# EAGLE board edgemountBoard (EAGLE 8.2.2)
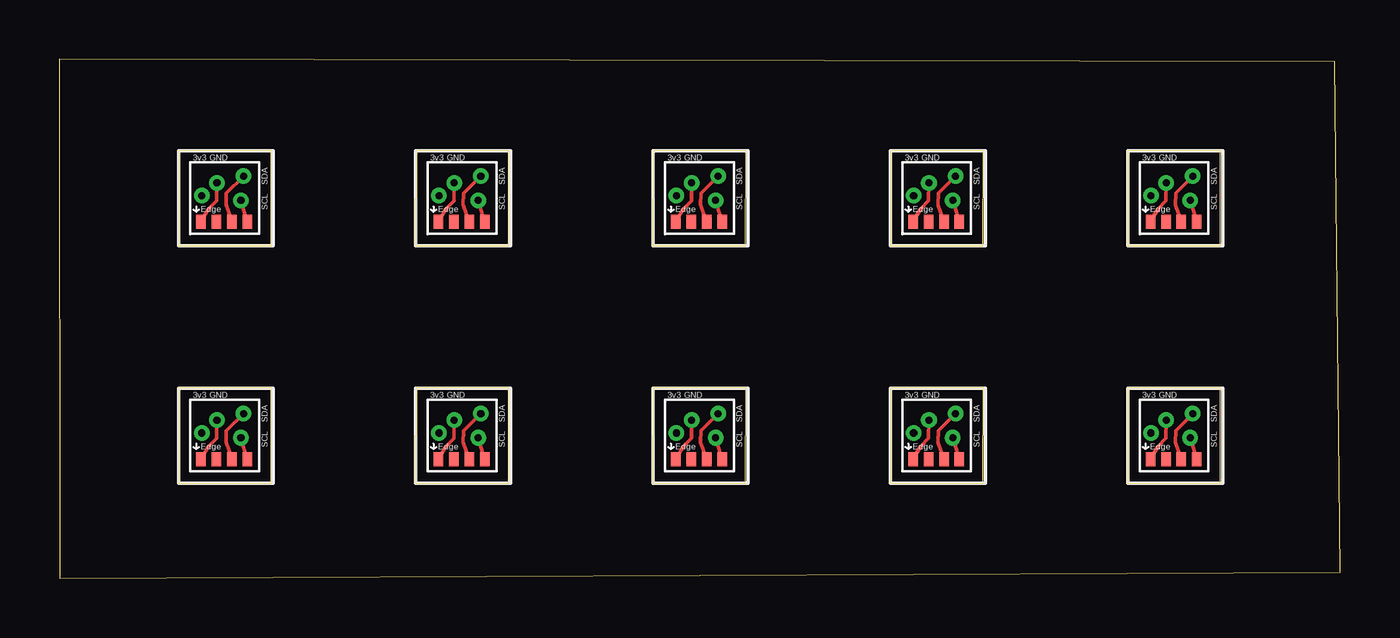
[diagram p0: board, top side]
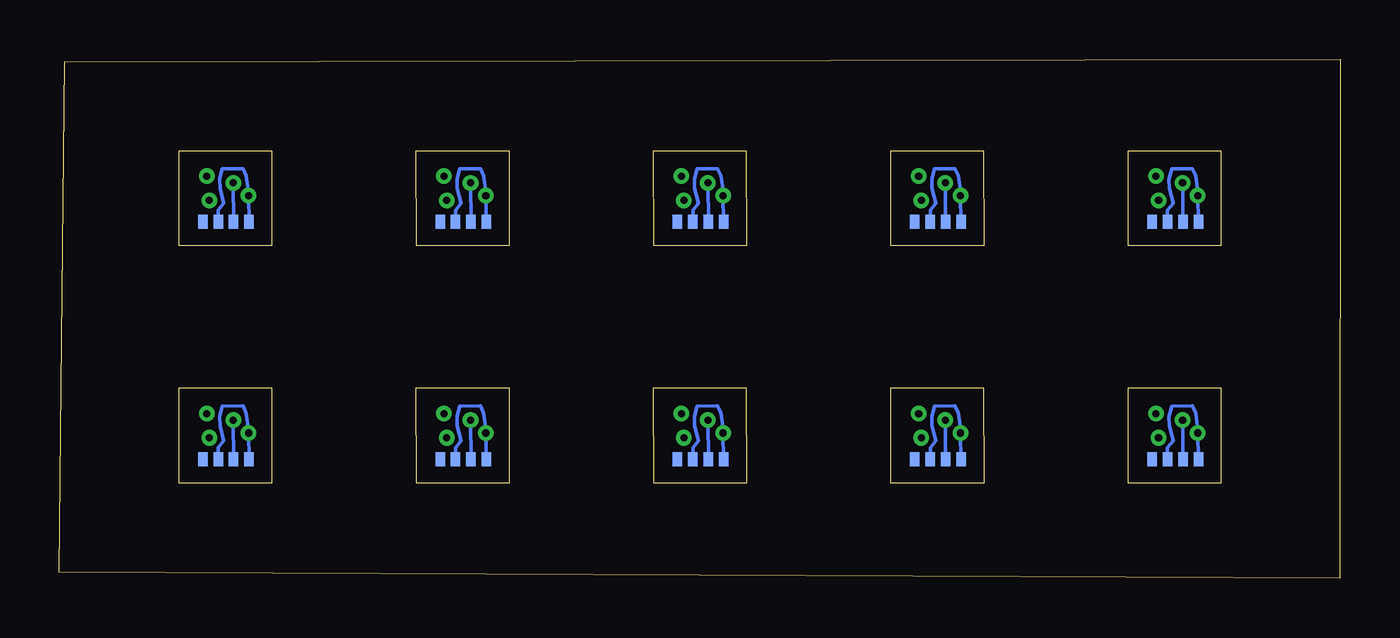
[diagram p1: board, bottom side, seen from below]

Size 53.97 x 21.86 mm. Coordinates in mm from the lower left corner, seen from the top.
Outline: 0.02,0 53.97,0.26 53.74,21.76 0,21.86 0.02,0
Outline: 5.02,4 8.92,4 8.93,8.02 5.03,8.02 5.02,4
Outline: 15.02,4 18.92,4 18.93,8.02 15.03,8.02 15.02,4
Outline: 25.02,4 28.92,4 28.93,8.02 25.03,8.02 25.02,4
Outline: 35.02,4 38.92,4 38.93,8.02 35.03,8.02 35.02,4
Outline: 5.02,14 8.92,14 8.93,18.02 5.03,18.02 5.02,14
Outline: 15.02,14 18.92,14 18.93,18.02 15.03,18.02 15.02,14
Outline: 25.02,14 28.92,14 28.93,18.02 25.03,18.02 25.02,14
Outline: 35.02,14 38.92,14 38.93,18.02 35.03,18.02 35.02,14
Outline: 45.02,4 48.92,4 48.93,8.02 45.03,8.02 45.02,4
Outline: 45.02,14 48.92,14 48.93,18.02 45.03,18.02 45.02,14
Copper layers (1*16): Top 0.0356mm / dielectric 1.5011mm / Bottom 0.0356mm
Design rules "oshpark-2layer *": minimum track width 6mil, minimum drill 12mil, track to track 6mil, track to pad 6mil, pad to pad 6mil, via to via 6mil, smd to smd 6mil, copper to edge 15mil, drill to drill 6mil, minimum pad ring 7mil, minimum via ring 7mil, stop-mask expansion 2.5mil, vias tented up to drill 0mil, thermal gap 10mil

## Footprints (pad centres in the part's own frame; a part is rotated, then mirrored left to right if it is on the bottom)
AMPHENOL_NPA201_EDGEMOUNT = smd 0.4 x 0.6: P$1 0.975,-0.725; P$2 0.325,-0.725; P$3 -0.325,-0.725; P$4 -0.975,-0.725 | smd 0.4 x 0.6 bottom: P$5 -0.975,-0.725; P$6 -0.325,-0.725; P$7 0.325,-0.725; P$8 0.975,-0.725
WIREPAD_0,5/0,3 = drill 0.3 pad 0.5: P$1 0,0

## Placement (x,y rotation side)
U$1  AMPHENOL_NPA201EDGEMOUNT  [AMPHENOL_NPA201_EDGEMOUNT]  6.95,4.29 180 top
U$2  WIREPADWIREPAD_0,5/0,3  [WIREPAD_0,5/0,3]  7.76,6.94 180 top
U$3  WIREPADWIREPAD_0,5/0,3  [WIREPAD_0,5/0,3]  7.65,5.92 0 top
U$4  WIREPADWIREPAD_0,5/0,3  [WIREPAD_0,5/0,3]  6.64,6.66 0 top
U$5  WIREPADWIREPAD_0,5/0,3  [WIREPAD_0,5/0,3]  6,6.12 0 top
U$6  AMPHENOL_NPA201EDGEMOUNT  [AMPHENOL_NPA201_EDGEMOUNT]  16.95,4.29 180 top
U$7  WIREPADWIREPAD_0,5/0,3  [WIREPAD_0,5/0,3]  17.76,6.94 180 top
U$8  WIREPADWIREPAD_0,5/0,3  [WIREPAD_0,5/0,3]  17.65,5.92 0 top
U$9  WIREPADWIREPAD_0,5/0,3  [WIREPAD_0,5/0,3]  16.64,6.66 0 top
U$10  WIREPADWIREPAD_0,5/0,3  [WIREPAD_0,5/0,3]  16,6.12 0 top
U$11  AMPHENOL_NPA201EDGEMOUNT  [AMPHENOL_NPA201_EDGEMOUNT]  26.95,4.29 180 top
U$12  WIREPADWIREPAD_0,5/0,3  [WIREPAD_0,5/0,3]  27.76,6.94 180 top
U$13  WIREPADWIREPAD_0,5/0,3  [WIREPAD_0,5/0,3]  27.65,5.92 0 top
U$14  WIREPADWIREPAD_0,5/0,3  [WIREPAD_0,5/0,3]  26.64,6.66 0 top
U$15  WIREPADWIREPAD_0,5/0,3  [WIREPAD_0,5/0,3]  26,6.12 0 top
U$16  AMPHENOL_NPA201EDGEMOUNT  [AMPHENOL_NPA201_EDGEMOUNT]  36.95,4.29 180 top
U$17  WIREPADWIREPAD_0,5/0,3  [WIREPAD_0,5/0,3]  37.76,6.94 180 top
U$18  WIREPADWIREPAD_0,5/0,3  [WIREPAD_0,5/0,3]  37.65,5.92 0 top
U$19  WIREPADWIREPAD_0,5/0,3  [WIREPAD_0,5/0,3]  36.64,6.66 0 top
U$20  WIREPADWIREPAD_0,5/0,3  [WIREPAD_0,5/0,3]  36,6.12 0 top
U$21  AMPHENOL_NPA201EDGEMOUNT  [AMPHENOL_NPA201_EDGEMOUNT]  6.95,14.29 180 top
U$22  WIREPADWIREPAD_0,5/0,3  [WIREPAD_0,5/0,3]  7.76,16.94 180 top
U$23  WIREPADWIREPAD_0,5/0,3  [WIREPAD_0,5/0,3]  7.65,15.92 0 top
U$24  WIREPADWIREPAD_0,5/0,3  [WIREPAD_0,5/0,3]  6.64,16.66 0 top
U$25  WIREPADWIREPAD_0,5/0,3  [WIREPAD_0,5/0,3]  6,16.12 0 top
U$26  AMPHENOL_NPA201EDGEMOUNT  [AMPHENOL_NPA201_EDGEMOUNT]  16.95,14.29 180 top
U$27  WIREPADWIREPAD_0,5/0,3  [WIREPAD_0,5/0,3]  17.76,16.94 180 top
U$28  WIREPADWIREPAD_0,5/0,3  [WIREPAD_0,5/0,3]  17.65,15.92 0 top
U$29  WIREPADWIREPAD_0,5/0,3  [WIREPAD_0,5/0,3]  16.64,16.66 0 top
U$30  WIREPADWIREPAD_0,5/0,3  [WIREPAD_0,5/0,3]  16,16.12 0 top
U$31  AMPHENOL_NPA201EDGEMOUNT  [AMPHENOL_NPA201_EDGEMOUNT]  26.95,14.29 180 top
U$32  WIREPADWIREPAD_0,5/0,3  [WIREPAD_0,5/0,3]  27.76,16.94 180 top
U$33  WIREPADWIREPAD_0,5/0,3  [WIREPAD_0,5/0,3]  27.65,15.92 0 top
U$34  WIREPADWIREPAD_0,5/0,3  [WIREPAD_0,5/0,3]  26.64,16.66 0 top
U$35  WIREPADWIREPAD_0,5/0,3  [WIREPAD_0,5/0,3]  26,16.12 0 top
U$36  AMPHENOL_NPA201EDGEMOUNT  [AMPHENOL_NPA201_EDGEMOUNT]  36.95,14.29 180 top
U$37  WIREPADWIREPAD_0,5/0,3  [WIREPAD_0,5/0,3]  37.76,16.94 180 top
U$38  WIREPADWIREPAD_0,5/0,3  [WIREPAD_0,5/0,3]  37.65,15.92 0 top
U$39  WIREPADWIREPAD_0,5/0,3  [WIREPAD_0,5/0,3]  36.64,16.66 0 top
U$40  WIREPADWIREPAD_0,5/0,3  [WIREPAD_0,5/0,3]  36,16.12 0 top
U$41  AMPHENOL_NPA201EDGEMOUNT  [AMPHENOL_NPA201_EDGEMOUNT]  46.95,4.29 180 top
U$42  WIREPADWIREPAD_0,5/0,3  [WIREPAD_0,5/0,3]  47.76,6.94 180 top
U$43  WIREPADWIREPAD_0,5/0,3  [WIREPAD_0,5/0,3]  47.65,5.92 0 top
U$44  WIREPADWIREPAD_0,5/0,3  [WIREPAD_0,5/0,3]  46.64,6.66 0 top
U$45  WIREPADWIREPAD_0,5/0,3  [WIREPAD_0,5/0,3]  46,6.12 0 top
U$46  AMPHENOL_NPA201EDGEMOUNT  [AMPHENOL_NPA201_EDGEMOUNT]  46.95,14.29 180 top
U$47  WIREPADWIREPAD_0,5/0,3  [WIREPAD_0,5/0,3]  47.76,16.94 180 top
U$48  WIREPADWIREPAD_0,5/0,3  [WIREPAD_0,5/0,3]  47.65,15.92 0 top
U$49  WIREPADWIREPAD_0,5/0,3  [WIREPAD_0,5/0,3]  46.64,16.66 0 top
U$50  WIREPADWIREPAD_0,5/0,3  [WIREPAD_0,5/0,3]  46,16.12 0 top

## Library data of the parts
U$1-U$50 = Sombeck_lib

## Nets
+3V1: U$6.P$6 U$6.P$8 U$10.P$1
+3V2: U$11.P$6 U$11.P$8 U$15.P$1
+3V3: U$1.P$6 U$1.P$8 U$5.P$1
+3V4: U$16.P$6 U$16.P$8 U$20.P$1
+3V5: U$21.P$6 U$21.P$8 U$25.P$1
+3V6: U$26.P$6 U$26.P$8 U$30.P$1
+3V7: U$31.P$6 U$31.P$8 U$35.P$1
+3V8: U$36.P$6 U$36.P$8 U$40.P$1
+3V9: U$41.P$6 U$41.P$8 U$45.P$1
+3V10: U$46.P$6 U$46.P$8 U$50.P$1
GND: U$1.P$1 U$1.P$7 U$4.P$1
GND1: U$6.P$1 U$6.P$7 U$9.P$1
GND2: U$11.P$1 U$11.P$7 U$14.P$1
GND3: U$16.P$1 U$16.P$7 U$19.P$1
GND4: U$21.P$1 U$21.P$7 U$24.P$1
GND5: U$26.P$1 U$26.P$7 U$29.P$1
GND6: U$31.P$1 U$31.P$7 U$34.P$1
GND7: U$36.P$1 U$36.P$7 U$39.P$1
GND8: U$41.P$1 U$41.P$7 U$44.P$1
GND9: U$46.P$1 U$46.P$7 U$49.P$1
N$1: U$1.P$3 U$2.P$1
N$2: U$1.P$4 U$3.P$1
N$3: U$6.P$3 U$7.P$1
N$4: U$6.P$4 U$8.P$1
N$5: U$11.P$3 U$12.P$1
N$6: U$11.P$4 U$13.P$1
N$7: U$16.P$3 U$17.P$1
N$8: U$16.P$4 U$18.P$1
N$9: U$21.P$3 U$22.P$1
N$10: U$21.P$4 U$23.P$1
N$11: U$26.P$3 U$27.P$1
N$12: U$26.P$4 U$28.P$1
N$13: U$31.P$3 U$32.P$1
N$14: U$31.P$4 U$33.P$1
N$15: U$36.P$3 U$37.P$1
N$16: U$36.P$4 U$38.P$1
N$17: U$41.P$3 U$42.P$1
N$18: U$41.P$4 U$43.P$1
N$19: U$46.P$3 U$47.P$1
N$20: U$46.P$4 U$48.P$1

## Tracks (layer width: path | path; a pad name or v marks a point on that pad's centre or on a via)
+3V1
  Bottom 0.152: U$6.P$8 U$10.P$1 15.99,6.24 16.09,6.96 16.23,7.26 17.1,7.25 17.21,6.8 17.2,6.43 17.04,5.79 17.27,5.5 U$6.P$6
+3V2
  Bottom 0.152: U$11.P$8 U$15.P$1 25.99,6.24 26.09,6.96 26.23,7.26 27.1,7.25 27.21,6.8 27.2,6.43 27.04,5.79 27.27,5.5 U$11.P$6
+3V3
  Bottom 0.152: U$1.P$8 U$5.P$1 5.99,6.24 6.09,6.96 6.23,7.26 7.1,7.25 7.21,6.8 7.2,6.43 7.04,5.79 7.27,5.5 U$1.P$6
+3V4
  Bottom 0.152: U$16.P$8 U$20.P$1 35.99,6.24 36.09,6.96 36.23,7.26 37.1,7.25 37.21,6.8 37.2,6.43 37.04,5.79 37.28,5.5 U$16.P$6
+3V5
  Bottom 0.152: U$21.P$8 U$25.P$1 5.99,16.24 6.09,16.96 6.23,17.26 7.1,17.25 7.21,16.8 7.2,16.43 7.04,15.79 7.27,15.49 U$21.P$6
+3V6
  Bottom 0.152: U$26.P$8 U$30.P$1 15.99,16.24 16.09,16.96 16.23,17.26 17.1,17.25 17.21,16.8 17.2,16.43 17.04,15.79 17.27,15.49 U$26.P$6
+3V7
  Bottom 0.152: U$31.P$8 U$35.P$1 25.99,16.24 26.09,16.96 26.23,17.26 27.1,17.25 27.21,16.8 27.2,16.43 27.04,15.79 27.27,15.49 U$31.P$6
+3V8
  Bottom 0.152: U$36.P$8 U$40.P$1 35.99,16.24 36.09,16.96 36.23,17.26 37.1,17.25 37.21,16.8 37.2,16.43 37.04,15.79 37.28,15.49 U$36.P$6
+3V9
  Bottom 0.152: U$41.P$8 U$45.P$1 45.99,6.24 46.09,6.96 46.23,7.26 47.1,7.25 47.21,6.8 47.2,6.43 47.04,5.79 47.28,5.5 U$41.P$6
+3V10
  Bottom 0.152: U$46.P$8 U$50.P$1 45.99,16.24 46.09,16.96 46.23,17.26 47.1,17.25 47.21,16.8 47.2,16.43 47.04,15.79 47.28,15.49 U$46.P$6
GND
  Top 0.152: U$1.P$1 6.28,5.55 6.63,5.91 U$4.P$1
  Bottom 0.152: U$1.P$7 U$4.P$1
GND1
  Top 0.152: U$6.P$1 16.28,5.55 16.63,5.91 U$9.P$1
  Bottom 0.152: U$6.P$7 U$9.P$1
GND2
  Top 0.152: U$11.P$1 26.28,5.55 26.63,5.91 U$14.P$1
  Bottom 0.152: U$11.P$7 U$14.P$1
GND3
  Top 0.152: U$16.P$1 36.28,5.55 36.63,5.91 U$19.P$1
  Bottom 0.152: U$16.P$7 U$19.P$1
GND4
  Top 0.152: U$21.P$1 6.28,15.55 6.63,15.91 U$24.P$1
  Bottom 0.152: U$21.P$7 U$24.P$1
GND5
  Top 0.152: U$26.P$1 16.28,15.55 16.63,15.91 U$29.P$1
  Bottom 0.152: U$26.P$7 U$29.P$1
GND6
  Top 0.152: U$31.P$1 26.28,15.55 26.63,15.91 U$34.P$1
  Bottom 0.152: U$31.P$7 U$34.P$1
GND7
  Top 0.152: U$36.P$1 36.28,15.55 36.63,15.91 U$39.P$1
  Bottom 0.152: U$36.P$7 U$39.P$1
GND8
  Top 0.152: U$41.P$1 46.28,5.55 46.63,5.91 U$44.P$1
  Bottom 0.152: U$41.P$7 U$44.P$1
GND9
  Top 0.152: U$46.P$1 46.28,15.55 46.63,15.91 U$49.P$1
  Bottom 0.152: U$46.P$7 U$49.P$1
N$1
  Top 0.152: U$1.P$3 7.02,5.74 7.04,6.22 U$2.P$1
N$2
  Top 0.152: U$1.P$4 U$3.P$1
N$3
  Top 0.152: U$6.P$3 17.02,5.74 17.04,6.22 U$7.P$1
N$4
  Top 0.152: U$6.P$4 U$8.P$1
N$5
  Top 0.152: U$11.P$3 27.02,5.74 27.04,6.22 U$12.P$1
N$6
  Top 0.152: U$11.P$4 U$13.P$1
N$7
  Top 0.152: U$16.P$3 37.02,5.74 37.04,6.22 U$17.P$1
N$8
  Top 0.152: U$16.P$4 U$18.P$1
N$9
  Top 0.152: U$21.P$3 7.02,15.74 7.04,16.22 U$22.P$1
N$10
  Top 0.152: U$21.P$4 U$23.P$1
N$11
  Top 0.152: U$26.P$3 17.02,15.74 17.04,16.22 U$27.P$1
N$12
  Top 0.152: U$26.P$4 U$28.P$1
N$13
  Top 0.152: U$31.P$3 27.02,15.74 27.04,16.22 U$32.P$1
N$14
  Top 0.152: U$31.P$4 U$33.P$1
N$15
  Top 0.152: U$36.P$3 37.02,15.74 37.04,16.22 U$37.P$1
N$16
  Top 0.152: U$36.P$4 U$38.P$1
N$17
  Top 0.152: U$41.P$3 47.02,5.74 47.04,6.22 U$42.P$1
N$18
  Top 0.152: U$41.P$4 U$43.P$1
N$19
  Top 0.152: U$46.P$3 47.02,15.74 47.04,16.22 U$47.P$1
N$20
  Top 0.152: U$46.P$4 U$48.P$1

## Text on the board
tPlace: 3v3 | GND | 3v3 | GND | 3v3 | GND | 3v3 | GND | 3v3 | GND | SDA | SDA | SDA | SDA | SDA | SCL | SCL | SCL | SCL | SCL | 3v3 | GND | 3v3 | GND | 3v3 | GND | 3v3 | GND | 3v3 | GND | SDA | SDA | SDA | SDA | SDA | SCL | SCL | SCL | SCL | SCL